# EAGLE board LAMEBOY (EAGLE 7.6.0)
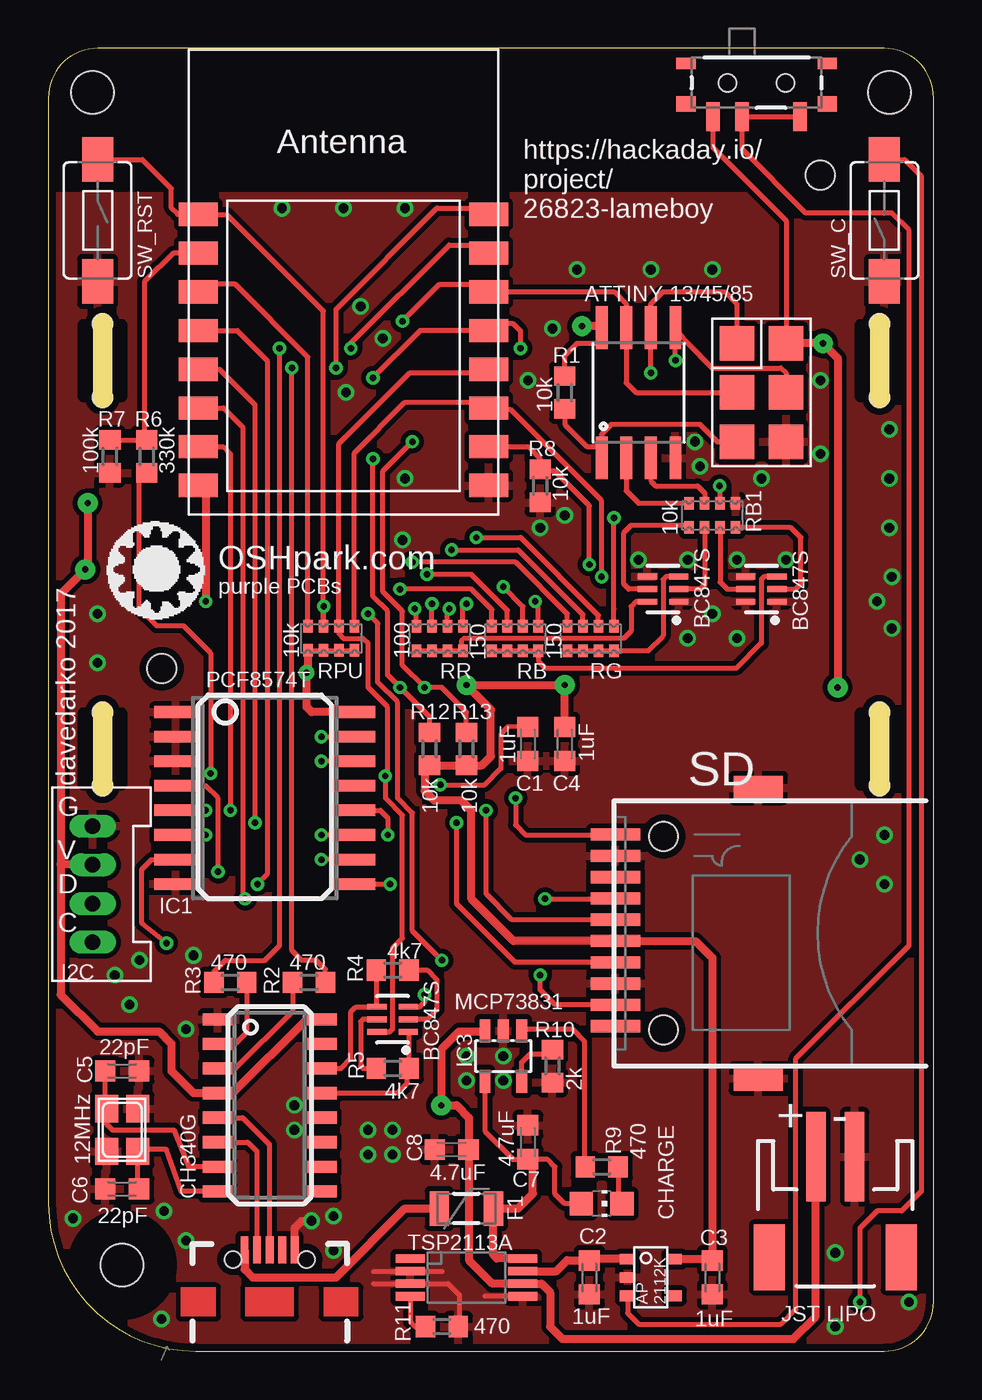
[diagram p0: board, top side]
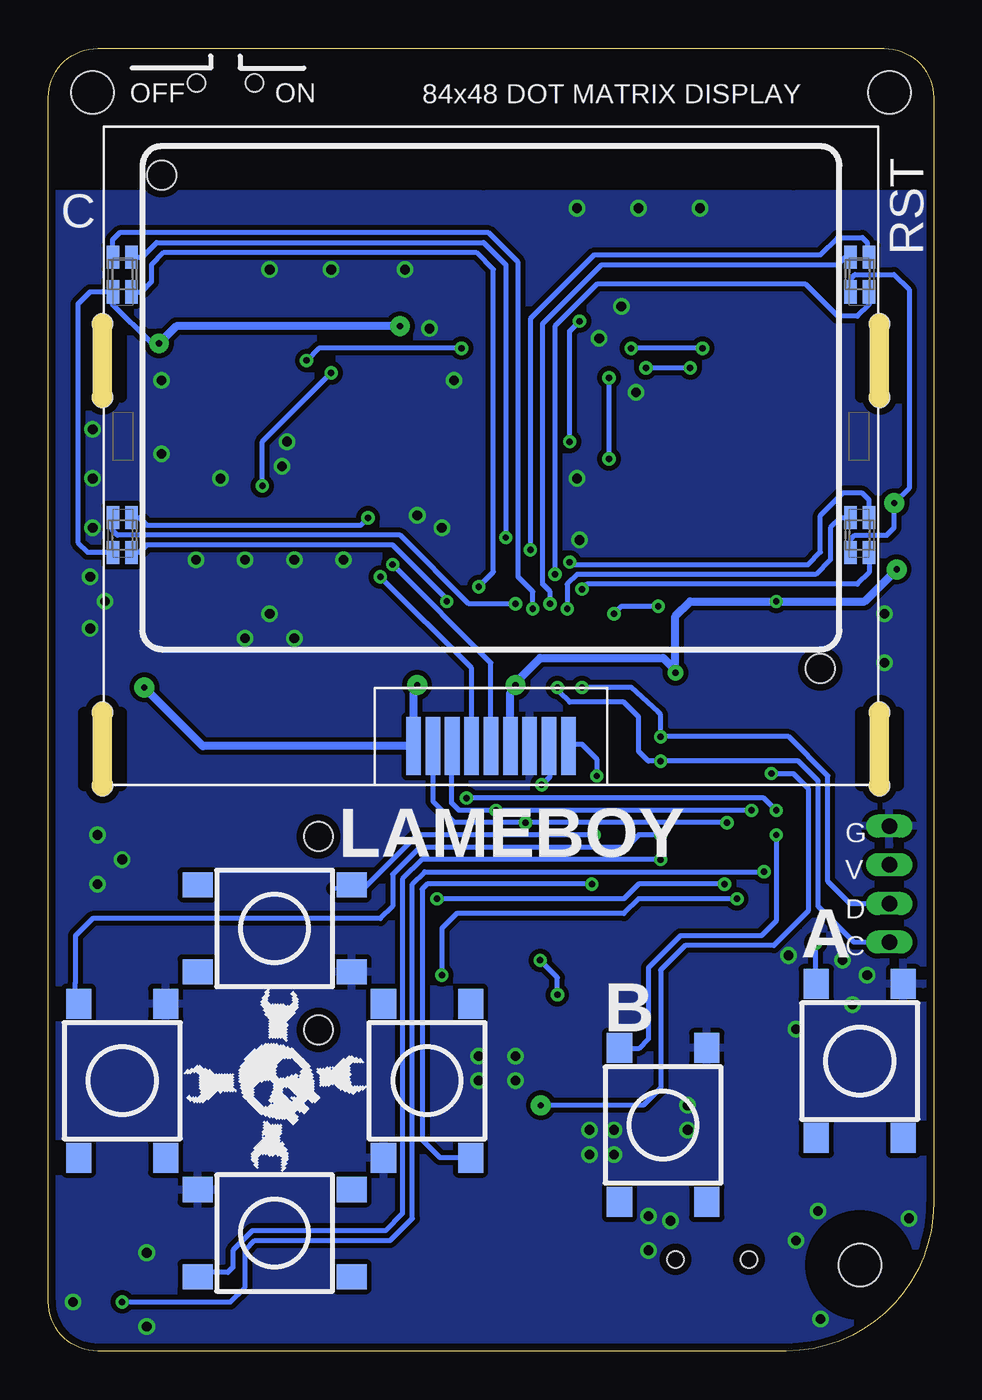
[diagram p1: board, bottom side, seen from below]

Size 45.72 x 67.31 mm. Coordinates in mm from the lower left corner, seen from the top.
Outline: 0,64.77 0,7.62 arc90 7.62,0 43.18,0 arc90 45.72,2.54 45.72,64.77 arc90 43.18,67.31 2.54,67.31 arc90 0,64.77
Copper layers (1*16): Top 0.0356mm / dielectric 1.5011mm / Bottom 0.0356mm
Design rules "LaenPCBOrder *": minimum track width 6mil, minimum drill 13mil, track to track 6mil, track to pad 6mil, pad to pad 6mil, via to via 6mil, smd to smd 6mil, copper to edge 15mil, drill to drill 6mil, minimum pad ring 7mil, minimum via ring 7mil, stop-mask expansion 3mil, vias tented up to drill 200mil, thermal gap 10mil
Holes 2.2 mm at 3.81,4.45 2.29,65.02 43.43,65.02
tRestrict: area 1.3,1.9 to 6.3,6.9
bRestrict: area 1.3,1.9 to 6.3,6.9

## Footprints (pad centres in the part's own frame; a part is rotated, then mirrored left to right if it is on the bottom)
C0603K = smd 1.05 x 1.08: 1 -0.875,0; 2 0.875,0
SOIC16 = smd 0.635 x 1.524: 1 -4.445,-2.695; 2 -3.175,-2.695; 3 -1.905,-2.695; 4 -0.635,-2.695; 5 0.635,-2.695; 6 1.905,-2.695; 7 3.175,-2.695; 8 4.445,-2.695; 9 4.445,2.695; 10 3.175,2.695; 11 1.905,2.695; 12 0.635,2.695; 13 -0.635,2.695; 14 -1.905,2.695; 15 -3.175,2.695; 16 -4.445,2.695
CHIP-LED0805 = smd 1.2 x 1.2: A 0,-1.05; C 0,1.05
PTC-1206 = smd 1 x 1.8: 1 -1.4,0; 2 1.4,0
SO16W = smd 0.6 x 2.2: 1 -4.445,-4.6; 2 -3.175,-4.6; 3 -1.905,-4.6; 4 -0.635,-4.6; 5 0.635,-4.6; 6 1.905,-4.6; 7 3.175,-4.6; 8 4.445,-4.6; 9 4.445,4.6; 10 3.175,4.6; 11 1.905,4.6; 12 0.635,4.6; 13 -0.635,4.6; 14 -1.905,4.6; 15 -3.175,4.6; 16 -4.445,4.6
SOT23-5L = smd 0.55 x 1.2: 1 -0.95,-1.3; 2 0,-1.3; 3 0.95,-1.3; 4 0.95,1.3; 5 -0.95,1.3
JST-2-SMD = smd 1 x 4.6: 1 -1,-3.7; 2 1,-3.7 | smd 1.6 x 3.4: NC1 -3.4,1.5; NC2 3.4,1.5
2X3_SMD_PAD = smd 1.778 x 1.778: P$1 -1.27,2.54; P$2 1.27,2.54; P$3 -1.27,0; P$4 1.27,0; P$5 -1.27,-2.54; P$6 1.27,-2.54
GM1WA55311A = smd 0.65 x 1.2: 1 -0.475,0.9; 2 -0.475,-0.9; 3 0.475,-0.9; 4 0.475,0.9
NX3225 = smd 1.4 x 1.2: 1 -1.1,-0.8; 2 1.1,-0.8; 3 1.1,0.8; 4 -1.1,0.8
R0603 = smd 1 x 1.1: 1 -0.85,0; 2 0.85,0
0603-ARC = smd 0.5 x 0.65: 1 -1.2,-0.625; 2 -0.4,-0.625; 3 0.4,-0.625; 4 1.2,-0.625; 5 1.2,0.625; 6 0.4,0.625; 7 -0.4,0.625; 8 -1.2,0.625
SWITCH-SPST-SMD-A = smd 0.7 x 1.5: 1 -2.25,-1.75; 2 -0.75,-1.75; 3 2.25,-1.75 | smd 1 x 0.6: GND1 -3.65,1; GND3 3.65,1 | smd 1 x 0.8: GND2 -3.65,-1.1; GND4 3.65,-1.1 | hole 0.9: -1.5,0; 1.5,0
TACTILE_SWITCH_TALL = smd 1.55 x 1.3: A1 -3.975,-2.25; A2 3.975,-2.25; B1 -3.975,2.25; B2 3.975,2.25
TACTILE-SWITCH-1101NE = smd 2.3 x 1.6: P$1 -3.15,0; P$2 3.15,0
MICRO-SD-SOCKET-EBAY = smd 0.63 x 2.54: P$1 -2.9,-5; P$2 -1.8,-5; P$4 0.4,-5; P$5 1.5,-5; P$6 2.6,-5; P$7 3.7,-5; P$8 4.8,-5; SW1 -5.1,-5; SW2 -4,-5 | smd 0.635 x 2.54: P$3 -0.7,-5 | smd 1.27 x 2.54: SH1 -7.5,2.37; SH2 7.5,2.37 | hole 1.5: -5,-2.52; 5,-2.52
USB-AB-MICRO-SMD_V03 = smd 1.4 x 0.4: D+1 2.7,0; D-1 2.7,0.65; GND1 2.7,-1.3; ID1 2.7,-0.65; VBUS1 2.7,1.3 | hole 0.85: 2.2,1.9; 2.2,-1.9
LPH-7366-SLOTS = smd 0.75 x 3: 1 4,17; 2 3,17; 3 2,17; 4 1,17; 5 0,17; 6 -1,17; 7 -2,17; 8 -3,17; 9 -4,17 | hole 1.5: -17,13; 17,-12.5 | hole 1.016: -20.066,19.05; -20.066,15.24; 20.066,19.05; 20.066,15.24; 20.066,-1.016; 20.066,-4.826; -20.066,-1.016; -20.066,-4.826
SO08-EIAJ = smd 0.61 x 2.21: 1 -1.905,-3.378; 2 -0.635,-3.378; 3 0.635,-3.378; 4 1.905,-3.378; 5 1.905,3.353; 6 0.635,3.353; 7 -0.635,3.353; 8 -1.905,3.353
SOT363 = smd 0.3 x 0.99: 1 -0.65,-0.8; 2 0,-0.8; 3 0.65,-0.8; 4 0.65,0.81; 5 0,0.81; 6 -0.65,0.81
TEXAS-PW = smd 1.5 x 0.45: 1 -2.9,0.975; 2 -2.9,0.325; 3 -2.9,-0.325; 4 -2.9,-0.975; 5 2.9,-0.975; 6 2.9,-0.325; 7 2.9,0.325; 8 2.9,0.975
AP2112 = smd 0.55 x 0.8: P$1 0.95,1.2; P$2 0,1.2; P$3 -0.95,1.2; P$4 -0.95,-1.2; P$5 0.95,-1.2
I2C_GROVE = drill 0.8 long: P$1 0,3; P$2 0,1; P$3 0,-1; P$4 0,-3
ESP-12 = smd 2 x 1.2: 1 -7.5,4.5; 2 -7.5,2.5; 3 -7.5,0.5; 4 -7.5,-1.5; 5 -7.5,-3.5; 6 -7.5,-5.5; 7 -7.5,-7.5; 8 -7.5,-9.5; 9 7.5,-9.5; 10 7.5,-7.5; 11 7.5,-5.5; 12 7.5,-3.5; 13 7.5,-1.5; 14 7.5,0.5; 15 7.5,2.5; 16 7.5,4.5

## Placement (x,y rotation side)
C1  1uF  [C0603K]  24.77,31.37 270 top
C2  1uF  [C0603K]  27.94,3.81 270 top
C3  1uF  [C0603K]  34.29,3.81 270 top
C4  1uF  [C0603K]  26.67,31.37 270 top
C5  22pF  [C0603K]  3.81,14.48 180 top
C6  22pF  [C0603K]  3.81,8.38 0 top
C7  4.7uF  [C0603K]  24.77,10.79 270 top
C8  4.7uF  [C0603K]  20.83,10.41 180 top
CH340G  CH340GCH340G  [SOIC16]  11.43,12.7 270 top
CHARGE  [CHIP-LED0805]  28.57,7.62 270 top
F1  PTCSMD  [PTC-1206]  21.59,7.37 0 top
IC1  PCF8574T  [SO16W]  11.18,28.57 270 top
IC3  MCP73831  [SOT23-5L]  23.5,15.24 180 top
J1  [JST-2-SMD]  40.64,6.35 180 top
JP2  AVR_SPI_PRG_6  [2X3_SMD_PAD]  36.83,49.53 0 top
LED1  GM1WA55311A  [GM1WA55311A]  41.91,42.16 180 bottom
LED2  GM1WA55311A  [GM1WA55311A]  41.91,55.63 180 bottom
LED3  GM1WA55311A  [GM1WA55311A]  3.81,55.63 180 bottom
LED4  GM1WA55311A  [GM1WA55311A]  3.81,42.16 180 bottom
Q1  12MHz  [NX3225]  3.81,11.43 270 top
R1  10k  [R0603]  26.67,49.53 90 top
R2  470  [R0603]  13.46,19.05 180 top
R3  470  [R0603]  9.4,19.05 0 top
R4  4k7  [R0603]  17.78,19.68 0 top
R5  4k7  [R0603]  17.78,14.61 180 top
R6  330k  [R0603]  5.08,46.23 270 top
R7  100k  [R0603]  3.17,46.23 90 top
R8  10k  [R0603]  25.4,44.7 270 top
R9  470  [R0603]  28.57,9.53 180 top
R10  2k  [R0603]  26.04,14.73 90 top
R11  470  [R0603]  20.32,1.27 180 top
R12  10k  [R0603]  19.68,31.11 90 top
R13  10k  [R0603]  21.59,31.11 90 top
RB  150  [0603-ARC]  24.1,36.82 180 top
RB1  10k  [0603-ARC]  34.29,43.18 0 top
RG  150  [0603-ARC]  28.01,36.82 180 top
RPU  10k  [0603-ARC]  14.61,36.83 0 top
RR  100  [0603-ARC]  20.21,36.82 180 top
S2  PWR  [SWITCH-SPST-SMD-A]  36.58,65.53 0 top
S3  SWITCH-MOMENTARY-2SMD-4  [TACTILE_SWITCH_TALL]  3.81,14.99 90 bottom
S4  SWITCH-MOMENTARY-2SMD-4  [TACTILE_SWITCH_TALL]  13.97,11.68 90 bottom
S5  SWITCH-MOMENTARY-2SMD-4  [TACTILE_SWITCH_TALL]  41.91,13.97 90 bottom
S6  SWITCH-MOMENTARY-2SMD-4  [TACTILE_SWITCH_TALL]  34.04,6.1 180 bottom
S7  SWITCH-MOMENTARY-2SMD-4  [TACTILE_SWITCH_TALL]  26.16,13.97 270 bottom
S8  SWITCH-MOMENTARY-2SMD-4  [TACTILE_SWITCH_TALL]  34.04,21.84 0 bottom
SW_C  [TACTILE-SWITCH-1101NE]  43.18,58.42 90 top
SW_RST  [TACTILE-SWITCH-1101NE]  2.54,58.42 270 top
U1  USD-SOCKETMICROSDEBAY  [MICRO-SD-SOCKET-EBAY]  34.29,21.59 270 top
U2  USB  [USB-AB-MICRO-SMD_V03]  11.43,2.54 90 top
U$1  LPH-7366-SLOTS  [LPH-7366-SLOTS]  22.86,48.26 180 bottom
U$2  ATTINY13SO08-WIDE  [SO08-EIAJ]  30.48,49.53 0 top
U$3  BC847S  [SOT363]  17.78,17.14 90 top
U$4  TPS2113-PW  [TEXAS-PW]  21.59,3.81 0 top
U$5  [OSHPARK_LOGO]  14.48,40.39 0 top
U$6  BC847S  [SOT363]  31.75,39.37 90 top
U$7  BC847S  [SOT363]  36.83,39.37 90 top
U$8  [HACKADAY_LOGO]  33.79,13.73 45 bottom
U$9  AP2112KAP2112K  [AP2112]  31.11,3.81 90 top
U$10  I2C_GROVE  [I2C_GROVE]  2.29,24.13 0 top
X1  [ESP-12]  15.24,54.23 0 top

## Library data of the parts
C1-C8 R1-R13 = rcl
CH340G = ch340g
CHARGE LED1-LED4 = led
F1 = SparkFun-PowerIC; PROD_ID: RES-11150
IC1 = micro-philips; MPN: PCF8574T/3,512; OC_FARNELL: 1201255; OC_NEWARK: 70R6870
IC3 Q1 X1 = adafruit
J1 = SparkFun-Connectors; PROD_ID: CONN-08352
JP2 U1 = SparkFun-Connectors
RB RB1 RG RPU RR = resistor-dil; OC_FARNELL: unknown; OC_NEWARK: unknown
S2 SW_C SW_RST = SparkFun-Electromechanical
S3-S8 = SparkFun-Electromechanical; PROD_ID: SWCH-11966
U2 = SparkFun-Connectors; PROD_ID: CONN-11794
U$1 = lph-7366
U$2 = SparkFun-DigitalIC
U$3 U$6 U$7 = SparkFun-DiscreteSemi
U$4 U$9 U$10 = TPS2113
U$5 U$8 = LOGOS

## Nets
ADC: R6.1 R7.2 X1.2
AVR_RST: JP2.P$5 R1.1 U$2.1
BLU: RB.5 RB.6 RB.7 RB.8 U$7.3
BTN_A: IC1.7 S3.B2
BTN_B: IC1.6 S4.B2
BTN_C: IC1.4 SW_C.P$2
BTN_DWN: IC1.10 S6.B2
BTN_LEFT: IC1.11 S5.B2
BTN_RIGHT: IC1.9 S7.B2
BTN_UP: IC1.12 S8.B2
C_GRN: RB1.8 U$2.2
C_RED: RB1.7 U$2.3
DM: CH340G.6 U2.D-1
DP: CH340G.5 U2.D+1
DTR: CH340G.13 R5.1 U$3.1
EN_ESP: RPU.8 X1.3
ESP_MISO: U1.P$7 X1.6
ESP_MOSI: U1.P$3 U$1.3 X1.7
ESP_SCKL: U1.P$5 U$1.2 X1.5
GND: C1.2 C2.2 C3.2 C4.2 C5.1 C6.1 C7.1 C8.2 CH340G.1 IC1.1 IC1.2 IC1.3 IC1.8 IC3.2 J1.1 JP2.P$6 Q1.2 Q1.4 R7.1 R8.2 R10.1 R11.1 RB1.5 S3.A2 S4.A2 S5.A2 S6.A2 S7.A2 S8.A2 SW_C.P$1 SW_RST.P$2 U1.P$6 U1.SH1 U1.SH2 U1.SW2 U2.GND1 U$1.7 U$2.4 U$4.2 U$4.3 U$4.5 U$6.1 U$6.4 U$7.1 U$7.4 U$7.6 U$9.P$2 U$10.P$1 X1.9
GPIO0: RPU.6 U$1.9 U$3.6 X1.12
GPIO2: RPU.5 U$1.4 X1.11
GPIO15: R8.1 U$1.5 X1.10
GRN: RG.5 RG.6 RG.7 RG.8 U$6.3
L2_R: LED1.3 RR.1
L3_B: LED1.1 RB.1
L4_G: LED1.2 RG.1
MISO: JP2.P$1 RB1.6 U$2.6
N$1: LED4.1 RB.4
N$2: LED4.3 RR.4
N$3: LED4.2 RG.4
N$4: LED3.1 RB.3
N$5: LED3.3 RR.3
N$6: LED3.2 RG.3
N$7: LED2.1 RB.2
N$8: C1.1 U$1.8
N$9: LED2.3 RR.2
N$10: LED2.2 RG.2
N$11: RB1.1 U$6.5
N$12: IC3.1 R9.2
N$13: RB1.2 U$6.2
N$15: CHARGE.C R9.1
N$17: C5.2 CH340G.7 Q1.1
N$18: RB1.3 U$7.5
N$19: RB1.4 U$7.2
N$20: R11.2 U$4.4
N$21: IC3.5 R10.2
N$24: C6.2 CH340G.8 Q1.3
N$25: R5.2 U$3.5
N$26: CH340G.3 R2.2
N$27: CH340G.2 R3.2
N$28: R4.2 U$3.2
RED: RR.5 RR.6 RR.7 RR.8 U$6.6
RST_ESP: RPU.7 SW_RST.P$1 U$3.3 X1.1
RTS: CH340G.14 R4.1 U$3.4
RX_ESP: R3.1 X1.15
SCL: IC1.14 JP2.P$3 R13.2 U$2.7 U$10.P$4 X1.14
SD_CS: U1.P$2 X1.4
SD_IN: IC1.5 U1.SW1
SDA: IC1.15 JP2.P$4 R12.2 U$2.5 U$10.P$3 X1.13
TX_ESP: R2.1 X1.16
VBAT: C8.1 IC3.3 J1.2 R6.2 U$4.6
VBUS: C7.2 CHARGE.A F1.2 IC3.4 U$4.8
VCC: C3.1 C4.1 CH340G.4 CH340G.16 IC1.16 JP2.P$2 LED1.4 LED2.4 LED3.4 LED4.4 R1.2 R12.1 R13.1 RPU.1 RPU.2 RPU.3 RPU.4 S2.1 U1.P$4 U$1.1 U$1.6 U$2.8 U$9.P$5 U$10.P$2 X1.8
VREG_IN: C2.1 U$4.7 U$9.P$1
VREG_OUT: S2.2 S2.3 U$9.P$3
VUSB: F1.1 U2.VBUS1

## Tracks (layer width: path | path; a pad name or v marks a point on that pad's centre or on a via)
ADC
  Top 0.254: 7.66,57.19 X1.2 6.44,56.73 4.95,55.24 4.95,47.2 R6.1 R7.2
AVR_RST
  Top 0.254: R1.1 26.67,47.88 27.81,46.74 28.37,46.74 U$2.1 28.57,47.37 29.08,47.88 33.66,47.88 34.54,46.99 JP2.P$5
BLU
  Top 0.254: RB.5 RB.6 RB.7 RB.8 25.3,35.66 25.65,35.31 35.56,35.31 36.83,36.58 36.83,39.88 36.97,40.02 U$7.3
BTN_A  (via drill 0.33)
  Top 0.254: v6.1,21.08 4.83,22.1 4.83,24.89 5.33,25.4 IC1.7
  Bottom 0.254: S3.B2 6.1,19.25 v6.1,21.08
BTN_B  (via drill 0.33)
  Top 0.254: IC1.6 v8.13,26.67
  Bottom 0.254: v8.13,26.67 8.13,22.23 8.89,21.46 13.08,21.46 14.73,19.81 14.73,16.13 15.24,15.62 16.05,15.62 S4.B2
BTN_C  (via drill 0.33)
  Top 0.254: SW_C.P$2 44.22,61.57 45.09,60.71 45.09,8.26 44.07,7.24 42.8,7.24 41.91,6.35 v41.91,2.54 | v8.76,24.77 8.76,28.57 8.13,29.21 IC1.4
  Bottom 0.254: v41.91,2.54 36.32,2.54 35.56,3.3 35.56,5.21 35.05,5.71 28.07,5.71 26.92,6.86 26.92,24.13 26.29,24.77 v8.76,24.77
BTN_DWN  (via drill 0.33)
  Top 0.254: IC1.10 v14.1,25.4
  Bottom 0.254: v14.1,25.4 26.42,25.4 27.43,24.38 27.43,7.11 28.32,6.22 35.18,6.22 36.2,5.21 36.2,4.32 36.45,4.06 37.52,4.06 37.55,4.1 S6.B2
BTN_LEFT  (via drill 0.33)
  Top 0.254: IC1.11 v14.1,26.67
  Bottom 0.254: v14.1,26.67 15.24,26.67 15.88,26.04 26.54,26.04 27.94,24.64 27.94,22.99 28.57,22.35 43.43,22.35 44.32,21.46 44.32,19.05 44.32,18.11 | 44.32,18.11 44.32,17.37 | S5.B2 44.32,18.11
BTN_RIGHT  (via drill 0.33)
  Top 0.254: IC1.9 v17.65,24.13
  Bottom 0.254: v17.65,24.13 26.16,24.13 26.42,23.88 26.42,10.92 25.49,9.99 S7.B2
BTN_UP  (via drill 0.33)
  Top 0.254: IC1.12 17.14,27.94 17.53,27.56 v17.53,26.67
  Bottom 0.254: v17.53,26.67 26.67,26.67 29.46,23.88 30.48,23.89 | 30.48,23.89 30.99,23.9 | S8.B2 30.37,23.89 30.48,23.89
C_GRN
  Top 0.254: U$2.2 29.84,44.45 30.48,43.81 31.81,43.81 RB1.8
C_RED
  Top 0.254: U$2.3 31.11,44.96 31.37,44.7 33.53,44.7 33.91,44.32 33.91,43.82 RB1.7
DM
  Top 0.254: CH340G.6 10.29,10.79 10.78,10.3 U2.D-1
DP
  Top 0.254: CH340G.5 10.03,12.06 11.43,10.67 U2.D+1
DTR
  Top 0.254: U$3.1 18.63,16.45 R5.1 18.54,14.52 18.54,13.84 18.03,13.34 CH340G.13
EN_ESP
  Top 0.254: RPU.8 13.4,51.37 9.65,55.12 7.75,55.12 X1.3
ESP_MISO  (via drill 0.33)
  Top 0.254: X1.6 9.06,48.73 10.03,47.75 10.03,23.5 v10.16,23.37 | U1.P$7 26.18,17.89 25.4,18.67 v25.4,19.43
  Bottom 0.254: v10.16,23.37 15.24,23.37 16,22.61 24.64,22.61 25.4,21.84 v25.4,19.43
ESP_MOSI  (via drill 0.33, 0.33 pad 0.61)
  Top 0.254: X1.7 9.02,46.73 9.4,46.35 v9.4,27.94 | U1.P$3 23.94,22.29 22.61,23.62 v22.61,27.94
  Bottom 0.254: v9.4,27.94 v22.61,27.94 24.51,27.94 24.89,28.32 24.89,31.23 U$1.3
ESP_SCKL  (via drill 0.33, 0.33 pad 0.61)
  Top 0.254: X1.5 8.83,50.73 10.67,48.9 v10.67,27.3 | v21.08,27.3 21.08,23.11 24.11,20.09 U1.P$5
  Bottom 0.254: v10.67,27.3 v21.08,27.3 24.77,27.3 25.86,28.4 U$1.2
GND  (via drill 0.5)
  Top 0.254: U$4.3 18.74,3.48 | 18.74,3.48 20.64,3.48 21.21,2.92 21.21,1.31 R11.1 | 16.79,4.12 18.37,4.12 | 18.37,4.12 18.74,4.12 | 18.37,4.12 20.33,4.12 | 16.79,3.48 18.74,3.48 | 22.55,2.85 24.45,2.85
  Top 0.406: U2.GND1 12.73,6.38 13.08,6.73 v13.59,6.73
  other vias: 1.27,6.86 5.84,1.65 40.64,1.27 40.64,5.08 44.45,2.54 33.02,40.89 30.48,40.89 35.56,40.89 38.1,40.89 34.29,38.1 33.02,36.83 35.56,36.83 2.54,35.56 2.54,38.1 33.4,46.99 33.66,45.72 36.83,45.09 43.43,47.62 43.43,45.09 42.8,38.73 43.56,40.01 43.43,42.55 43.56,37.34 26.67,43.18 25.4,42.55 18.41,45.09 18.29,41.91 39.88,46.35 34.29,55.88 31.11,55.88 27.3,55.88 12.06,59.05 15.24,59.05 18.41,59.05 39.88,50.16 24.77,50.16 26.04,52.83 16.13,53.98 15.37,49.53 17.27,52.32 21.59,15.24 21.59,13.97 23.5,15.24 23.5,13.97 43.18,26.67 41.91,25.4 43.18,24.13 17.78,11.43 17.78,10.16 14.73,6.99 14.73,5.21 16.51,11.43 16.51,10.16 12.7,12.7 12.7,11.43 4.7,20.19 3.43,19.43 4.19,17.91 7.49,20.45 7.11,16.64 5.97,7.24 7.11,5.71
  pour Bottom (isolate 0.254): -2.54,59.77 48.26,59.77 48.26,-5.08 -2.54,-5.08
  pour Top (isolate 0.254): -3.81,59.69 49.53,59.69 49.53,-2.54 -3.81,-2.54
GPIO0  (via drill 0.33 pad 0.61)
  Top 0.254: X1.12 22.56,50.55 18.67,50.55 15.01,46.88 RPU.6 15.01,37.06 15.24,36.83 16.26,36.83 16.51,36.58 16.51,34.29 17.53,33.27 17.53,29.59 v17.4,29.72 17.4,28.57 18.29,27.69 18.29,21.34 17.78,20.83 17.78,16.64 17.64,16.5 U$3.6
  Bottom 0.254: U$1.9 18.86,31.3 18.8,31.37 18.16,31.37 17.4,30.61 v17.4,29.72
GPIO2  (via drill 0.33 pad 0.61)
  Top 0.254: RPU.5 15.8,46.41 18.41,49.02 22.91,49.02 X1.11 23.16,48.64 23.88,48.64 28.57,43.94 v28.57,40.01
  Bottom 0.254: U$1.4 23.86,35.29 v28.57,40.01
GPIO15  (via drill 0.33 pad 0.61)
  Top 0.254: v27.94,40.64 27.94,43.69 26.16,45.47 25.49,45.47 R8.1 25.4,46.1 24.77,46.73 X1.10
  Top 0.406: 25.18,45.84 R8.1
  Bottom 0.254: U$1.5 22.86,35.56 v27.94,40.64
GRN
  Top 0.254: RG.5 RG.6 RG.7 RG.8 30.98,36.19 31.75,36.96 31.75,39.88 31.89,40.02 U$6.3
L2_R  (via drill 0.33 pad 0.64)
  Top 0.254: RR.1 21.41,38.56 v21.59,38.61
  Bottom 0.254: v21.59,38.61 24,38.61 27.56,42.16 42.16,42.16 42.42,42.42 42.42,43.09 LED1.3
L3_B  (via drill 0.33 pad 0.64)
  Top 0.254: RB.1 25.3,38.58 v25.15,38.73
  Bottom 0.254: v25.15,38.73 25.15,38.86 27.94,41.66 40.64,41.66 41.03,41.26 LED1.1
L4_G  (via drill 0.33 pad 0.64)
  Top 0.254: RG.1 29.21,38.36 v29.21,43.05
  Bottom 0.254: LED1.2 41.03,43.06 40.64,42.67 29.59,42.67 v29.21,43.05
MISO  (via drill 0.33)
  Top 0.254: 31.11,52.7 U$2.6 | U$2.6 31.11,54.1 31.75,54.74 34.92,54.74 35.56,54.1 JP2.P$1 | RB1.6 34.69,44.69 v34.67,44.7 | v31.11,50.55 U$2.6
  Bottom 0.254: v34.67,44.7 34.67,46.99 v31.11,50.55
N$1  (via drill 0.33 pad 0.64)
  Top 0.254: RB.4 22.9,38.31 21.84,39.37 v18.16,39.37
  Bottom 0.254: LED4.1 3.34,40.23 3.94,39.62 17.91,39.62 v18.16,39.37
N$2  (via drill 0.33 pad 0.64)
  Top 0.254: RR.4 19.01,38.27 v18.92,38.35
  Bottom 0.254: LED4.3 4.83,43.05 5.33,42.55 5.33,40.89 6.1,40.13 18.41,40.13 18.92,39.62 v18.92,38.35
N$3  (via drill 0.33 pad 0.64)
  Top 0.254: RG.4 26.81,38.09 24.13,40.77 v18.8,40.77
  Bottom 0.254: v18.8,40.77 18.67,40.64 6.48,40.64 5.84,41.27 5.84,43.18 4.7,44.32 3.68,44.32 3.34,43.98 LED4.2
N$4  (via drill 0.33 pad 0.64)
  Top 0.254: RB.3 23.7,38.27 21.84,40.13 v19.56,40.13
  Bottom 0.254: LED3.1 3.34,54.07 3.94,53.47 4.95,53.47 6.6,55.12 17.4,55.12 19.56,52.96 v19.56,40.13
N$5  (via drill 0.33 pad 0.64)
  Top 0.254: RR.3 v19.81,38.61
  Bottom 0.254: v19.81,38.61 19.81,39.24 20.19,39.62 20.19,53.09 17.14,56.13 4.95,56.13 4.57,56.52 4.3,56.52 LED3.3
N$6  (via drill 0.33 pad 0.64)
  Top 0.254: RG.3 27.61,38.05 24.26,41.4 v20.83,41.4
  Bottom 0.254: v20.83,41.4 20.83,53.34 17.53,56.64 5.84,56.64 4.95,57.53 3.68,57.53 3.43,57.28 3.43,56.62 LED3.2
N$7  (via drill 0.33 pad 0.64)
  Top 0.254: RB.2 24.5,38.47 v23.5,39.5
  Bottom 0.254: v23.5,39.5 22.73,40.26 22.73,55.88 23.62,56.77 39.75,56.77 40.39,56.13 40.39,55.24 40.91,54.73 LED2.1
N$8  (via drill 0.33 pad 0.61)
  Top 0.254: v20.24,29.26 22.53,29.26 23.37,30.1 23.37,31.88 23.75,32.26 C1.1
  Bottom 0.254: v20.24,29.26 19.81,29.69 19.81,30.99 U$1.8
N$9  (via drill 0.33 pad 0.64)
  Top 0.254: RR.2 20.61,38.19 v20.7,38.35
  Bottom 0.254: v20.7,38.35 20.7,39.24 21.46,40.01 21.46,56.26 22.99,57.78 42.04,57.78 42.42,57.4 42.42,56.56 LED2.3
N$10  (via drill 0.33 pad 0.64)
  Top 0.254: v22.1,42.04 24.38,42.04 28.41,38.02 RG.2
  Bottom 0.254: LED2.2 40.88,56.52 40.13,57.28 23.24,57.28 22.1,56.13 v22.1,42.04
N$11
  Top 0.254: U$6.5 29.97,39.37 29.72,39.62 29.72,42.29 30.1,42.67 32.97,42.67 RB1.1
N$12
  Top 0.254: IC3.1 24.45,16.57 24.51,16.64 27.05,16.64 27.69,16 27.69,9.56 R9.2
N$13
  Top 0.254: RB1.2 33.89,39.6 33.66,39.37 U$6.2
N$15
  Top 0.254: R9.1 29.43,7.82 CHARGE.C
N$17
  Top 0.254: CH340G.7 7.24,9.53 6.48,11.43 3.3,11.43 3.01,11.72 Q1.1 2.94,12.61 C5.2
N$18
  Top 0.254: RB1.3 34.69,39.73 35.05,39.37 U$7.5
N$19
  Top 0.254: U$7.2 38.61,39.37 38.86,39.62 38.86,42.04 38.35,42.55 RB1.4
N$20
  Top 0.254: U$4.4 18.69,1.5 18.92,1.27 R11.2
N$21
  Top 0.254: IC3.5 24.45,14.92 24.89,15.37 25.91,15.37 26.16,15.49 26.16,15.58 R10.2
N$24
  Top 0.254: CH340G.8 6.86,8.26 6.1,10.41 4.69,10.41 Q1.3 4.61,8.46 C6.2
N$25
  Top 0.254: U$3.5 16.26,17.14 16.13,17.02 16.13,14.73 16.26,14.61 R5.2
N$26
  Top 0.254: CH340G.3 9.65,14.61 12.61,17.57 R2.2
N$27
  Top 0.254: CH340G.2 9.65,15.88 10.25,16.47 R3.2
N$28
  Top 0.254: R4.2 19.56,19.68 20.07,19.18 20.07,17.65 19.56,17.14 U$3.2
RED
  Top 0.254: RR.5 RR.6 RR.7 RR.8 21.34,36.27 21.34,36.7 21.46,36.83 29.72,36.83 30.1,37.21 30.1,38.48 30.34,38.72 U$6.6
RST_ESP  (via drill 0.33, 0.33 pad 0.64)
  Top 0.254: v20.32,20.19 18.8,21.72 18.8,27.81 18.03,28.57 18.03,33.53 17.02,34.54 17.02,37.59 v16.51,38.1 | SW_RST.P$1 4.85,61.57 6.35,60.07 6.35,59.05 6.67,58.74 X1.1 9.22,58.73 14.21,53.74 RPU.7 14.22,37.44 v14.22,38.48 | U$3.3 19.19,17.8 19.43,18.03 v19.43,18.41
  Bottom 0.254: v19.43,18.41 19.43,19.3 v20.32,20.19 | v14.22,38.48 16.13,38.48 v16.51,38.1
RTS
  Top 0.254: R4.1 16.93,17.84 U$3.4 16.95,17.78 15.88,17.78 15.62,17.53 15.62,15.11 15.11,14.61 CH340G.14
RX_ESP  (via drill 0.33 pad 0.64)
  Top 0.254: v11.94,51.82 11.94,20.95 11.18,20.19 9.14,20.19 8.55,19.6 R3.1 | v15.62,51.82 15.62,52.07 20.7,57.15 22.7,57.15 X1.15
  Bottom 0.254: v11.94,51.82 v15.62,51.82
SCL  (via drill 0.33)
  Top 0.254: JP2.P$3 30.35,49.53 29.84,50.04 U$2.7 29.84,54.1 29.22,54.73 X1.14 22.73,55.12 20.19,55.12 v18.29,53.21 | v14.1,30.48 IC1.14 | v18.8,46.99 17.27,45.47 17.27,39.24 18.29,38.23 18.29,35.43 v19.43,34.29 20.32,34.29 21.59,33.02 R13.2
  Bottom 0.254: v19.43,34.29 19.3,34.04 18.8,33.53 16,33.53 15.24,32.77 15.24,30.99 14.73,30.48 v14.1,30.48 6.99,30.48 5.97,29.46 5.97,22.99 4.11,21.13 U$10.P$4 | v18.8,46.99 18.8,52.7 v18.29,53.21
SD_CS  (via drill 0.33)
  Top 0.254: X1.4 9.76,52.73 11.3,51.18 11.3,24.64 v10.79,24.13 | v25.65,23.37 29.27,23.37 U1.P$2
  Bottom 0.254: v10.79,24.13 15.24,24.13 16,23.37 v25.65,23.37
SD_IN  (via drill 0.33)
  Top 0.254: IC1.5 v8.13,27.94 | v24.13,28.57 24.13,27.18 24.64,26.67 29.27,26.67 U1.SW1
  Bottom 0.254: v8.13,27.94 8.76,28.57 v24.13,28.57
SDA  (via drill 0.33, 0.33 pad 0.64)
  Top 0.254: v32.38,51.18 U$2.5 32.94,52.15 34.29,50.8 37.85,50.8 38.1,50.55 JP2.P$4 | v14.1,31.75 IC1.15 | v16.76,46.1 16.76,38.99 17.53,38.23 17.53,34.92 v18.16,34.29 19.68,32.77 R12.2 | v16.76,50.29 19.2,52.73 X1.13 22.76,53.09 24,53.09 24.38,52.7 v24.38,51.82
  Bottom 0.254: v24.38,51.82 31.75,51.82 v32.38,51.18 | v18.16,34.29 15.62,34.29 14.22,33.02 14.1,32.89 v14.1,31.75 7.49,31.75 5.46,29.72 5.46,24.26 4.33,23.13 U$10.P$3 | v16.76,46.1 v16.76,50.29
TX_ESP  (via drill 0.33 pad 0.64)
  Top 0.254: v12.57,50.8 12.57,20.7 13.08,20.19 13.84,20.19 14.31,19.72 R2.1 | v14.86,50.8 14.86,53.85 20.07,59.05 22.68,59.05 X1.16
  Bottom 0.254: v12.57,50.8 v14.86,50.8
VBAT  (via drill 0.33 pad 0.61, 0.33 pad 1.02)
  Top 0.254: v8.38,29.84 8.38,36.07 6.99,37.47 5.59,37.47 4.7,38.35 4.7,44.96 5.08,45.34 R6.2
  Top 0.406: J1.2 39.62,11.3 39.62,1.78 38.48,0.64 26.54,0.64 25.91,1.27 25.91,3.05 25.47,3.48 U$4.6 22.93,3.48 21.72,4.7 C8.1 | 21.69,10.51 C8.1 | IC3.3 22.52,16.51 21.21,16.51 20.32,15.62 20.32,12.73 v20.29,12.7 21.08,12.7 21.72,12.06 21.72,10.43 C8.1
  Bottom 0.254: v8.38,29.84 7.24,29.84 6.48,29.08 6.48,22.73 8.26,20.95 12.83,20.95 14.1,19.68 14.1,13.59 14.99,12.7 v20.29,12.7
VBUS
  Top 0.254: IC3.4 22.55,11.36 24,9.91 24.77,9.9 C7.2 24.78,9.91 25.78,9.91 26.16,9.53 26.16,8.13 26.67,7.62 CHARGE.A
  Top 0.406: U$4.8 23.16,4.79 22.99,4.95 22.99,6.98 F1.2 24.26,7.37 25.02,8.13 25.02,9.78 C7.2
VCC  (via drill 0.33, 0.33 pad 0.81, 0.33 pad 1.02)
  Top 0.254: RPU.4 RPU.3 RPU.2 RPU.1 | R1.2 26.67,51.44 27.3,52.07 28.5,52.07 U$2.8 | 13.4,34.98 v13.34,35.05 | S2.1 34.33,62.19 38.1,58.42 JP2.P$2
  Top 0.406: CH340G.16 13.34,17.14 9.53,13.34 CH340G.4 7.49,13.34 6.35,14.48 6.35,15.88 5.71,16.51 2.54,16.51 0.64,18.41 0.64,25.15 | U$2.8 28.57,52.96 v27.56,52.96 | JP2.P$2 v40.01,52.07 40.77,51.31 v40.77,34.29 | v2.03,43.81 2.03,40.39 v1.91,40.39 0.64,39.12 0.64,25.15 | RPU.1 13.4,34.98 | IC1.16 13.59,33.02 13.34,33.27 v13.34,35.05 | X1.8 8.12,44.7 v8.13,38.73 | C4.1 v26.67,34.42 v21.59,34.42 22.86,33.15 22.86,30.73 22.39,30.27 R13.1 R12.1 19.47,30.27 19.43,29.97 19.43,28.96 19.94,28.45 21.34,28.45 21.84,27.94 21.84,23.37 24.02,21.19 U1.P$4 33.42,21.19 34.29,20.32 C3.1 34.22,4.76 U$9.P$5 | U$10.P$2 2.27,25.15 0.64,25.15
  Bottom 0.254: LED3.4 4.29,55.4 4.06,55.63 2.03,55.63 1.27,54.86 1.27,44.58 v2.03,43.81 2.03,42.55 2.41,42.16 4.06,42.16 4.29,41.94 LED4.4 | LED1.4 42.4,41.27 43.69,41.27 44.2,41.78 44.2,54.1 43.57,54.73 LED2.4 42.42,54.69 42.42,54.1 40.39,52.07 v40.01,52.07
  Bottom 0.406: v27.56,52.96 39.12,52.96 v40.01,52.07 | v1.91,40.39 3.56,38.73 v8.13,38.73 12.57,38.73 13.34,37.97 v13.34,35.05 13.34,35.18 13.97,35.81 20.32,35.81 21.59,34.54 v21.59,34.42 21.86,34.02 U$1.6 | v40.77,34.29 37.74,31.26 U$1.1 26.86,33.97 v26.67,34.42
VREG_IN
  Top 0.406: U$4.7 26.23,4.13 26.8,4.7 27.93,4.7 C2.1 28.02,4.76 U$9.P$1
VREG_OUT
  Top 0.254: S2.3 S2.2 35.83,62.09 39.12,58.8 43.56,58.8 44.45,57.91 44.45,20.95 38.61,15.11 38.61,2.16 37.85,1.4 30.48,1.4 29.91,1.96 U$9.P$3
VUSB
  Top 0.406: U2.VBUS1 10.13,4.22 10.54,3.81 14.86,3.81 18.41,7.37 F1.1

## Text on the board
tNames: https://hackaday.io/ / project/ / 26823-lameboy | ATTINY 13/45/85 | BC847S | BC847S | davedarko 2017 | SD | I2C | BC847S | + - | 12MHz | CH340G | TSP2113A | JST LIPO
bNames: ON | OFF | 84x48 DOT MATRIX DISPLAY | C | RST | G | LAMEBOY | V | D | C | A | B